# Altium PCB TFT_Adapter_Board_拼版.PcbDoc (part 7 of 9)
Units mm, origin at the board's own origin, x right, y up, seen from the top; angles counter-clockwise.
Board outline 137 x 166.56 mm, 2 copper layers (Top Layer, Bottom Layer); 80 components, 32 nets, 2615 pads, 0 vias.
Unrouted connection lines stored in the file: 1248.
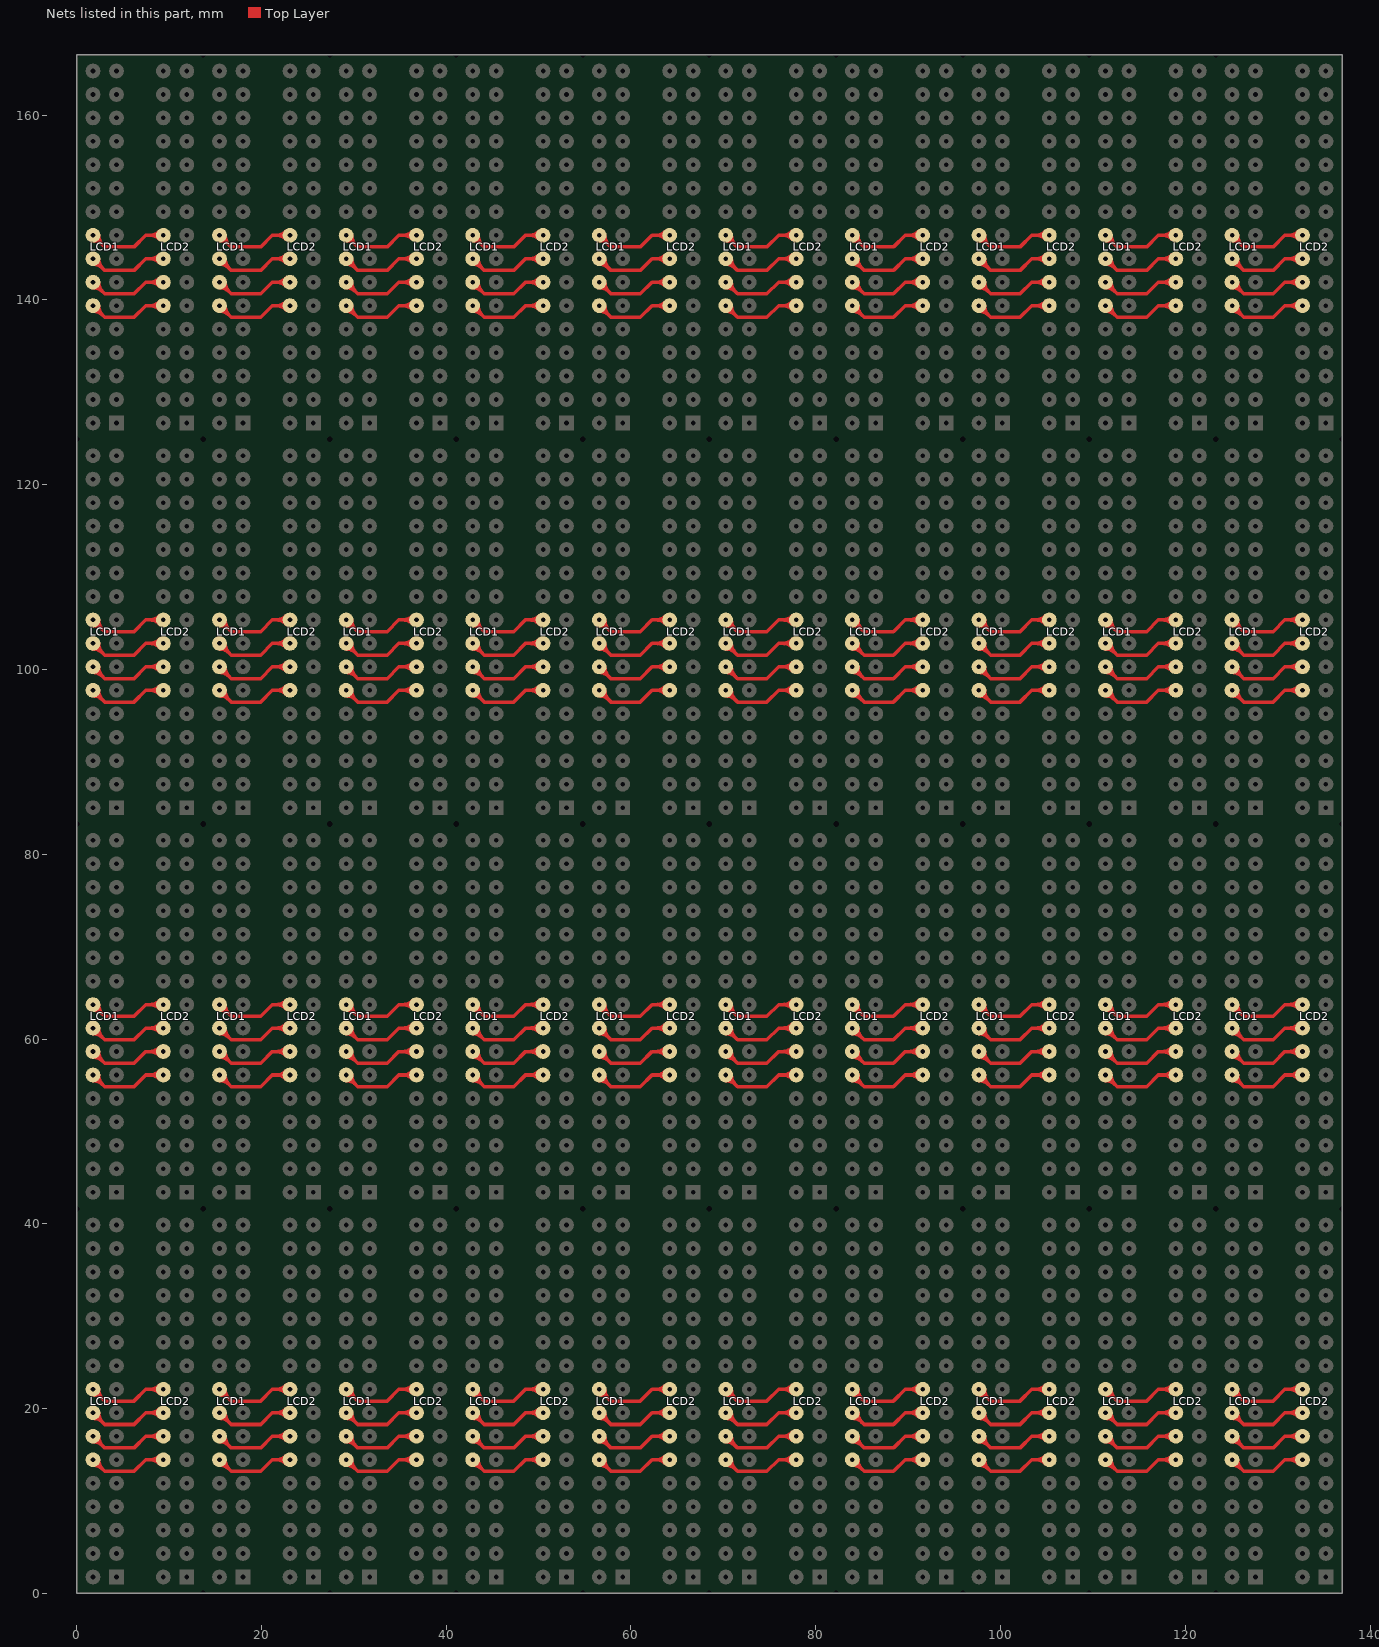
[diagram p7: the nets of this part, all layers, seen from the top]

## Nets (pads, with @x,y where several pads share a name; then routed paths per layer and width w, separated by ;. In a path a pad name is that pad's centre, name@x,y a point inside that pad or via, vN(x,y) a via of type N, cw(c..) or ccw(c..) an arc to the next point about the centre after c; other vN are vias at no path point) (continued)
NetLCD1_24: LCD1.24 LCD2.24 | length 531.8
  Top Layer w0.381: LCD1.24@1.77,21.481 cw(c1.77,20.009) 2.81,21.05 cw(c3.851,22.09) LCD1.24@2.379,22.09 ; LCD1.24@1.77,22.09 3.04,20.82 6.215,20.82 7.485,22.09 LCD2.24@9.39,22.09 ; LCD1.24@1.77,63.12 cw(c1.77,61.649) 2.81,62.69 cw(c3.851,63.73) LCD1.24@2.379,63.73 ; LCD1.24@1.77,63.73 3.04,62.46 6.215,62.46 7.485,63.73 LCD2.24@9.39,63.73 ; LCD1.24@1.77,104.76 cw(c1.77,103.289) 2.81,104.33 cw(c3.851,105.37) LCD1.24@2.379,105.37 ; LCD1.24@1.77,105.37 3.04,104.1 6.215,104.1 7.485,105.37 LCD2.24@9.39,105.37 ; LCD1.24@1.77,146.4 cw(c1.77,144.929) 2.81,145.97 cw(c3.851,147.01) LCD1.24@2.379,147.01 ; LCD1.24@1.77,147.01 3.04,145.74 6.215,145.74 7.485,147.01 LCD2.24@9.39,147.01 ; LCD2.24@8.959,21.659 ccw(c7.919,20.619) 7.919,22.09 ccw(c7.919,23.561) LCD2.24@8.959,22.521 ; LCD2.24@8.959,63.299 ccw(c7.919,62.259) 7.919,63.73 ccw(c7.919,65.201) LCD2.24@8.959,64.161 ; LCD2.24@8.959,104.939 ccw(c7.919,103.899) 7.919,105.37 ccw(c7.919,106.841) LCD2.24@8.959,105.801 ; LCD2.24@8.959,146.579 ccw(c7.919,145.539) 7.919,147.01 ccw(c7.919,148.481) LCD2.24@8.959,147.441 ; LCD1.24@15.47,21.481 cw(c15.47,20.009) 16.51,21.05 cw(c17.551,22.09) LCD1.24@16.079,22.09 ; LCD1.24@15.47,22.09 16.74,20.82 19.915,20.82 21.185,22.09 LCD2.24@23.09,22.09 ; LCD1.24@15.47,63.12 cw(c15.47,61.649) 16.51,62.69 cw(c17.551,63.73) LCD1.24@16.079,63.73 ; LCD1.24@15.47,63.73 16.74,62.46 19.915,62.46 21.185,63.73 LCD2.24@23.09,63.73 ; LCD1.24@15.47,104.76 cw(c15.47,103.289) 16.51,104.33 cw(c17.551,105.37) LCD1.24@16.079,105.37 ; LCD1.24@15.47,105.37 16.74,104.1 19.915,104.1 21.185,105.37 LCD2.24@23.09,105.37 ; LCD1.24@15.47,146.4 cw(c15.47,144.929) 16.51,145.97 cw(c17.551,147.01) LCD1.24@16.079,147.01 ; LCD1.24@15.47,147.01 16.74,145.74 19.915,145.74 21.185,147.01 LCD2.24@23.09,147.01 ; LCD2.24@22.659,21.659 ccw(c21.619,20.619) 21.619,22.09 ccw(c21.619,23.561) LCD2.24@22.659,22.521 ; LCD2.24@22.659,63.299 ccw(c21.619,62.259) 21.619,63.73 ccw(c21.619,65.201) LCD2.24@22.659,64.161 ; LCD2.24@22.659,104.939 ccw(c21.619,103.899) 21.619,105.37 ccw(c21.619,106.841) LCD2.24@22.659,105.801 ; LCD2.24@22.659,146.579 ccw(c21.619,145.539) 21.619,147.01 ccw(c21.619,148.481) LCD2.24@22.659,147.441 ; LCD1.24@29.17,21.481 cw(c29.17,20.009) 30.21,21.05 cw(c31.251,22.09) LCD1.24@29.779,22.09 ; LCD1.24@29.17,22.09 30.44,20.82 33.615,20.82 34.885,22.09 LCD2.24@36.79,22.09 ; LCD1.24@29.17,63.12 cw(c29.17,61.649) 30.21,62.69 cw(c31.251,63.73) LCD1.24@29.779,63.73 ; LCD1.24@29.17,63.73 30.44,62.46 33.615,62.46 34.885,63.73 LCD2.24@36.79,63.73 ; LCD1.24@29.17,104.76 cw(c29.17,103.289) 30.21,104.33 cw(c31.251,105.37) LCD1.24@29.779,105.37 ; LCD1.24@29.17,105.37 30.44,104.1 33.615,104.1 34.885,105.37 LCD2.24@36.79,105.37 ; LCD1.24@29.17,146.4 cw(c29.17,144.929) 30.21,145.97 cw(c31.251,147.01) LCD1.24@29.779,147.01 ; LCD1.24@29.17,147.01 30.44,145.74 33.615,145.74 34.885,147.01 LCD2.24@36.79,147.01 ; LCD2.24@36.359,21.659 ccw(c35.319,20.619) 35.319,22.09 ccw(c35.319,23.561) LCD2.24@36.359,22.521 ; LCD2.24@36.359,63.299 ccw(c35.319,62.259) 35.319,63.73 ccw(c35.319,65.201) LCD2.24@36.359,64.161 ; LCD2.24@36.359,104.939 ccw(c35.319,103.899) 35.319,105.37 ccw(c35.319,106.841) LCD2.24@36.359,105.801 ; LCD2.24@36.359,146.579 ccw(c35.319,145.539) 35.319,147.01 ccw(c35.319,148.481) LCD2.24@36.359,147.441 ; LCD1.24@42.87,21.481 cw(c42.87,20.009) 43.91,21.05 cw(c44.951,22.09) LCD1.24@43.479,22.09 ; LCD1.24@42.87,22.09 44.14,20.82 47.315,20.82 48.585,22.09 LCD2.24@50.49,22.09 ; LCD1.24@42.87,63.12 cw(c42.87,61.649) 43.91,62.69 cw(c44.951,63.73) LCD1.24@43.479,63.73 ; LCD1.24@42.87,63.73 44.14,62.46 47.315,62.46 48.585,63.73 LCD2.24@50.49,63.73 ; LCD1.24@42.87,104.76 cw(c42.87,103.289) 43.91,104.33 cw(c44.951,105.37) LCD1.24@43.479,105.37 ; LCD1.24@42.87,105.37 44.14,104.1 47.315,104.1 48.585,105.37 LCD2.24@50.49,105.37 ; LCD1.24@42.87,146.4 cw(c42.87,144.929) 43.91,145.97 cw(c44.951,147.01) LCD1.24@43.479,147.01 ; LCD1.24@42.87,147.01 44.14,145.74 47.315,145.74 48.585,147.01 LCD2.24@50.49,147.01 ; LCD2.24@50.059,21.659 ccw(c49.019,20.619) 49.019,22.09 ccw(c49.019,23.561) LCD2.24@50.059,22.521 ; LCD2.24@50.059,63.299 ccw(c49.019,62.259) 49.019,63.73 ccw(c49.019,65.201) LCD2.24@50.059,64.161 ; LCD2.24@50.059,104.939 ccw(c49.019,103.899) 49.019,105.37 ccw(c49.019,106.841) LCD2.24@50.059,105.801 ; LCD2.24@50.059,146.579 ccw(c49.019,145.539) 49.019,147.01 ccw(c49.019,148.481) LCD2.24@50.059,147.441 ; LCD1.24@56.57,21.481 cw(c56.57,20.009) 57.61,21.05 cw(c58.651,22.09) LCD1.24@57.179,22.09 ; LCD1.24@56.57,22.09 57.84,20.82 61.015,20.82 62.285,22.09 LCD2.24@64.19,22.09 ; LCD1.24@56.57,63.12 cw(c56.57,61.649) 57.61,62.69 cw(c58.651,63.73) LCD1.24@57.179,63.73 ; LCD1.24@56.57,63.73 57.84,62.46 61.015,62.46 62.285,63.73 LCD2.24@64.19,63.73 ; LCD1.24@56.57,104.76 cw(c56.57,103.289) 57.61,104.33 cw(c58.651,105.37) LCD1.24@57.179,105.37 ; LCD1.24@56.57,105.37 57.84,104.1 61.015,104.1 62.285,105.37 LCD2.24@64.19,105.37 ; LCD1.24@56.57,146.4 cw(c56.57,144.929) 57.61,145.97 cw(c58.651,147.01) LCD1.24@57.179,147.01 ; LCD1.24@56.57,147.01 57.84,145.74 61.015,145.74 62.285,147.01 LCD2.24@64.19,147.01 ; LCD2.24@63.759,21.659 ccw(c62.719,20.619) 62.719,22.09 ccw(c62.719,23.561) LCD2.24@63.759,22.521 ; LCD2.24@63.759,63.299 ccw(c62.719,62.259) 62.719,63.73 ccw(c62.719,65.201) LCD2.24@63.759,64.161 ; LCD2.24@63.759,104.939 ccw(c62.719,103.899) 62.719,105.37 ccw(c62.719,106.841) LCD2.24@63.759,105.801 ; LCD2.24@63.759,146.579 ccw(c62.719,145.539) 62.719,147.01 ccw(c62.719,148.481) LCD2.24@63.759,147.441 ; LCD1.24@70.27,21.481 cw(c70.27,20.009) 71.31,21.05 cw(c72.351,22.09) LCD1.24@70.879,22.09 ; LCD1.24@70.27,22.09 71.54,20.82 74.715,20.82 75.985,22.09 LCD2.24@77.89,22.09 ; LCD1.24@70.27,63.12 cw(c70.27,61.649) 71.31,62.69 cw(c72.351,63.73) LCD1.24@70.879,63.73 ; LCD1.24@70.27,63.73 71.54,62.46 74.715,62.46 75.985,63.73 LCD2.24@77.89,63.73 ; LCD1.24@70.27,104.76 cw(c70.27,103.289) 71.31,104.33 cw(c72.351,105.37) LCD1.24@70.879,105.37 ; LCD1.24@70.27,105.37 71.54,104.1 74.715,104.1 75.985,105.37 LCD2.24@77.89,105.37 ; LCD1.24@70.27,146.4 cw(c70.27,144.929) 71.31,145.97 cw(c72.351,147.01) LCD1.24@70.879,147.01 ; LCD1.24@70.27,147.01 71.54,145.74 74.715,145.74 75.985,147.01 LCD2.24@77.89,147.01 ; LCD2.24@77.459,21.659 ccw(c76.419,20.619) 76.419,22.09 ccw(c76.419,23.561) LCD2.24@77.459,22.521 ; LCD2.24@77.459,63.299 ccw(c76.419,62.259) 76.419,63.73 ccw(c76.419,65.201) LCD2.24@77.459,64.161 ; LCD2.24@77.459,104.939 ccw(c76.419,103.899) 76.419,105.37 ccw(c76.419,106.841) LCD2.24@77.459,105.801 ; LCD2.24@77.459,146.579 ccw(c76.419,145.539) 76.419,147.01 ccw(c76.419,148.481) LCD2.24@77.459,147.441 ; LCD1.24@83.97,21.481 cw(c83.97,20.009) 85.01,21.05 cw(c86.051,22.09) LCD1.24@84.579,22.09 ; LCD1.24@83.97,22.09 85.24,20.82 88.415,20.82 89.685,22.09 LCD2.24@91.59,22.09 ; LCD1.24@83.97,63.12 cw(c83.97,61.649) 85.01,62.69 cw(c86.051,63.73) LCD1.24@84.579,63.73 ; LCD1.24@83.97,63.73 85.24,62.46 88.415,62.46 89.685,63.73 LCD2.24@91.59,63.73 ; LCD1.24@83.97,104.76 cw(c83.97,103.289) 85.01,104.33 cw(c86.051,105.37) LCD1.24@84.579,105.37 ; LCD1.24@83.97,105.37 85.24,104.1 88.415,104.1 89.685,105.37 LCD2.24@91.59,105.37 ; LCD1.24@83.97,146.4 cw(c83.97,144.929) 85.01,145.97 cw(c86.051,147.01) LCD1.24@84.579,147.01 ; LCD1.24@83.97,147.01 85.24,145.74 88.415,145.74 89.685,147.01 LCD2.24@91.59,147.01 ; LCD2.24@91.159,21.659 ccw(c90.119,20.619) 90.119,22.09 ccw(c90.119,23.561) LCD2.24@91.159,22.521 ; LCD2.24@91.159,63.299 ccw(c90.119,62.259) 90.119,63.73 ccw(c90.119,65.201) LCD2.24@91.159,64.161 ; LCD2.24@91.159,104.939 ccw(c90.119,103.899) 90.119,105.37 ccw(c90.119,106.841) LCD2.24@91.159,105.801 ; LCD2.24@91.159,146.579 ccw(c90.119,145.539) 90.119,147.01 ccw(c90.119,148.481) LCD2.24@91.159,147.441 ; LCD1.24@97.67,21.481 cw(c97.67,20.009) 98.71,21.05 cw(c99.751,22.09) LCD1.24@98.279,22.09 ; LCD1.24@97.67,22.09 98.94,20.82 102.115,20.82 103.385,22.09 LCD2.24@105.29,22.09 ; LCD1.24@97.67,63.12 cw(c97.67,61.649) 98.71,62.69 cw(c99.751,63.73) LCD1.24@98.279,63.73 ; LCD1.24@97.67,63.73 98.94,62.46 102.115,62.46 103.385,63.73 LCD2.24@105.29,63.73 ; LCD1.24@97.67,104.76 cw(c97.67,103.289) 98.71,104.33 cw(c99.751,105.37) LCD1.24@98.279,105.37 ; LCD1.24@97.67,105.37 98.94,104.1 102.115,104.1 103.385,105.37 LCD2.24@105.29,105.37 ; LCD1.24@97.67,146.4 cw(c97.67,144.929) 98.71,145.97 cw(c99.751,147.01) LCD1.24@98.279,147.01 ; LCD1.24@97.67,147.01 98.94,145.74 102.115,145.74 103.385,147.01 LCD2.24@105.29,147.01 ; LCD2.24@104.859,21.659 ccw(c103.819,20.619) 103.819,22.09 ccw(c103.819,23.561) LCD2.24@104.859,22.521 ; LCD2.24@104.859,63.299 ccw(c103.819,62.259) 103.819,63.73 ccw(c103.819,65.201) LCD2.24@104.859,64.161 ; LCD2.24@104.859,104.939 ccw(c103.819,103.899) 103.819,105.37 ccw(c103.819,106.841) LCD2.24@104.859,105.801 ; LCD2.24@104.859,146.579 ccw(c103.819,145.539) 103.819,147.01 ccw(c103.819,148.481) LCD2.24@104.859,147.441 ; LCD1.24@111.37,21.481 cw(c111.37,20.009) 112.41,21.05 cw(c113.451,22.09) LCD1.24@111.979,22.09 ; LCD1.24@111.37,22.09 112.64,20.82 115.815,20.82 117.085,22.09 LCD2.24@118.99,22.09 ; LCD1.24@111.37,63.12 cw(c111.37,61.649) 112.41,62.69 cw(c113.451,63.73) LCD1.24@111.979,63.73 ; LCD1.24@111.37,63.73 112.64,62.46 115.815,62.46 117.085,63.73 LCD2.24@118.99,63.73 ; LCD1.24@111.37,104.76 cw(c111.37,103.289) 112.41,104.33 cw(c113.451,105.37) LCD1.24@111.979,105.37 ; LCD1.24@111.37,105.37 112.64,104.1 115.815,104.1 117.085,105.37 LCD2.24@118.99,105.37 ; LCD1.24@111.37,146.4 cw(c111.37,144.929) 112.41,145.97 cw(c113.451,147.01) LCD1.24@111.979,147.01 ; LCD1.24@111.37,147.01 112.64,145.74 115.815,145.74 117.085,147.01 LCD2.24@118.99,147.01 ; LCD2.24@118.559,21.659 ccw(c117.519,20.619) 117.519,22.09 ccw(c117.519,23.561) LCD2.24@118.559,22.521 ; LCD2.24@118.559,63.299 ccw(c117.519,62.259) 117.519,63.73 ccw(c117.519,65.201) LCD2.24@118.559,64.161 ; LCD2.24@118.559,104.939 ccw(c117.519,103.899) 117.519,105.37 ccw(c117.519,106.841) LCD2.24@118.559,105.801 ; LCD2.24@118.559,146.579 ccw(c117.519,145.539) 117.519,147.01 ccw(c117.519,148.481) LCD2.24@118.559,147.441 ; LCD1.24@125.07,21.481 cw(c125.07,20.009) 126.11,21.05 cw(c127.151,22.09) LCD1.24@125.679,22.09 ; LCD1.24@125.07,22.09 126.34,20.82 129.515,20.82 130.785,22.09 LCD2.24@132.69,22.09 ; LCD1.24@125.07,63.12 cw(c125.07,61.649) 126.11,62.69 cw(c127.151,63.73) LCD1.24@125.679,63.73 ; LCD1.24@125.07,63.73 126.34,62.46 129.515,62.46 130.785,63.73 LCD2.24@132.69,63.73 ; LCD1.24@125.07,104.76 cw(c125.07,103.289) 126.11,104.33 cw(c127.151,105.37) LCD1.24@125.679,105.37 ; LCD1.24@125.07,105.37 126.34,104.1 129.515,104.1 130.785,105.37 LCD2.24@132.69,105.37 ; LCD1.24@125.07,146.4 cw(c125.07,144.929) 126.11,145.97 cw(c127.151,147.01) LCD1.24@125.679,147.01 ; LCD1.24@125.07,147.01 126.34,145.74 129.515,145.74 130.785,147.01 LCD2.24@132.69,147.01 ; LCD2.24@132.259,21.659 ccw(c131.219,20.619) 131.219,22.09 ccw(c131.219,23.561) LCD2.24@132.259,22.521 ; LCD2.24@132.259,63.299 ccw(c131.219,62.259) 131.219,63.73 ccw(c131.219,65.201) LCD2.24@132.259,64.161 ; LCD2.24@132.259,104.939 ccw(c131.219,103.899) 131.219,105.37 ccw(c131.219,106.841) LCD2.24@132.259,105.801 ; LCD2.24@132.259,146.579 ccw(c131.219,145.539) 131.219,147.01 ccw(c131.219,148.481) LCD2.24@132.259,147.441
NetLCD1_25: LCD1.25 LCD2.25 | length 531.8
  Top Layer w0.381: LCD1.25@1.77,18.941 cw(c1.77,17.469) 2.81,18.51 cw(c3.851,19.55) LCD1.25@2.379,19.55 ; LCD1.25@1.77,19.55 3.04,18.28 6.215,18.28 7.485,19.55 LCD2.25@9.39,19.55 ; LCD1.25@1.77,60.58 cw(c1.77,59.109) 2.81,60.15 cw(c3.851,61.19) LCD1.25@2.379,61.19 ; LCD1.25@1.77,61.19 3.04,59.92 6.215,59.92 7.485,61.19 LCD2.25@9.39,61.19 ; LCD1.25@1.77,102.22 cw(c1.77,100.749) 2.81,101.79 cw(c3.851,102.83) LCD1.25@2.379,102.83 ; LCD1.25@1.77,102.83 3.04,101.56 6.215,101.56 7.485,102.83 LCD2.25@9.39,102.83 ; LCD1.25@1.77,143.86 cw(c1.77,142.389) 2.81,143.43 cw(c3.851,144.47) LCD1.25@2.379,144.47 ; LCD1.25@1.77,144.47 3.04,143.2 6.215,143.2 7.485,144.47 LCD2.25@9.39,144.47 ; LCD2.25@8.959,19.119 ccw(c7.919,18.079) 7.919,19.55 ccw(c7.919,21.021) LCD2.25@8.959,19.981 ; LCD2.25@8.959,60.759 ccw(c7.919,59.719) 7.919,61.19 ccw(c7.919,62.661) LCD2.25@8.959,61.621 ; LCD2.25@8.959,102.399 ccw(c7.919,101.359) 7.919,102.83 ccw(c7.919,104.301) LCD2.25@8.959,103.261 ; LCD2.25@8.959,144.039 ccw(c7.919,142.999) 7.919,144.47 ccw(c7.919,145.941) LCD2.25@8.959,144.901 ; LCD1.25@15.47,18.941 cw(c15.47,17.469) 16.51,18.51 cw(c17.551,19.55) LCD1.25@16.079,19.55 ; LCD1.25@15.47,19.55 16.74,18.28 19.915,18.28 21.185,19.55 LCD2.25@23.09,19.55 ; LCD1.25@15.47,60.58 cw(c15.47,59.109) 16.51,60.15 cw(c17.551,61.19) LCD1.25@16.079,61.19 ; LCD1.25@15.47,61.19 16.74,59.92 19.915,59.92 21.185,61.19 LCD2.25@23.09,61.19 ; LCD1.25@15.47,102.22 cw(c15.47,100.749) 16.51,101.79 cw(c17.551,102.83) LCD1.25@16.079,102.83 ; LCD1.25@15.47,102.83 16.74,101.56 19.915,101.56 21.185,102.83 LCD2.25@23.09,102.83 ; LCD1.25@15.47,143.86 cw(c15.47,142.389) 16.51,143.43 cw(c17.551,144.47) LCD1.25@16.079,144.47 ; LCD1.25@15.47,144.47 16.74,143.2 19.915,143.2 21.185,144.47 LCD2.25@23.09,144.47 ; LCD2.25@22.659,19.119 ccw(c21.619,18.079) 21.619,19.55 ccw(c21.619,21.021) LCD2.25@22.659,19.981 ; LCD2.25@22.659,60.759 ccw(c21.619,59.719) 21.619,61.19 ccw(c21.619,62.661) LCD2.25@22.659,61.621 ; LCD2.25@22.659,102.399 ccw(c21.619,101.359) 21.619,102.83 ccw(c21.619,104.301) LCD2.25@22.659,103.261 ; LCD2.25@22.659,144.039 ccw(c21.619,142.999) 21.619,144.47 ccw(c21.619,145.941) LCD2.25@22.659,144.901 ; LCD1.25@29.17,18.941 cw(c29.17,17.469) 30.21,18.51 cw(c31.251,19.55) LCD1.25@29.779,19.55 ; LCD1.25@29.17,19.55 30.44,18.28 33.615,18.28 34.885,19.55 LCD2.25@36.79,19.55 ; LCD1.25@29.17,60.58 cw(c29.17,59.109) 30.21,60.15 cw(c31.251,61.19) LCD1.25@29.779,61.19 ; LCD1.25@29.17,61.19 30.44,59.92 33.615,59.92 34.885,61.19 LCD2.25@36.79,61.19 ; LCD1.25@29.17,102.22 cw(c29.17,100.749) 30.21,101.79 cw(c31.251,102.83) LCD1.25@29.779,102.83 ; LCD1.25@29.17,102.83 30.44,101.56 33.615,101.56 34.885,102.83 LCD2.25@36.79,102.83 ; LCD1.25@29.17,143.86 cw(c29.17,142.389) 30.21,143.43 cw(c31.251,144.47) LCD1.25@29.779,144.47 ; LCD1.25@29.17,144.47 30.44,143.2 33.615,143.2 34.885,144.47 LCD2.25@36.79,144.47 ; LCD2.25@36.359,19.119 ccw(c35.319,18.079) 35.319,19.55 ccw(c35.319,21.021) LCD2.25@36.359,19.981 ; LCD2.25@36.359,60.759 ccw(c35.319,59.719) 35.319,61.19 ccw(c35.319,62.661) LCD2.25@36.359,61.621 ; LCD2.25@36.359,102.399 ccw(c35.319,101.359) 35.319,102.83 ccw(c35.319,104.301) LCD2.25@36.359,103.261 ; LCD2.25@36.359,144.039 ccw(c35.319,142.999) 35.319,144.47 ccw(c35.319,145.941) LCD2.25@36.359,144.901 ; LCD1.25@42.87,18.941 cw(c42.87,17.469) 43.91,18.51 cw(c44.951,19.55) LCD1.25@43.479,19.55 ; LCD1.25@42.87,19.55 44.14,18.28 47.315,18.28 48.585,19.55 LCD2.25@50.49,19.55 ; LCD1.25@42.87,60.58 cw(c42.87,59.109) 43.91,60.15 cw(c44.951,61.19) LCD1.25@43.479,61.19 ; LCD1.25@42.87,61.19 44.14,59.92 47.315,59.92 48.585,61.19 LCD2.25@50.49,61.19 ; LCD1.25@42.87,102.22 cw(c42.87,100.749) 43.91,101.79 cw(c44.951,102.83) LCD1.25@43.479,102.83 ; LCD1.25@42.87,102.83 44.14,101.56 47.315,101.56 48.585,102.83 LCD2.25@50.49,102.83 ; LCD1.25@42.87,143.86 cw(c42.87,142.389) 43.91,143.43 cw(c44.951,144.47) LCD1.25@43.479,144.47 ; LCD1.25@42.87,144.47 44.14,143.2 47.315,143.2 48.585,144.47 LCD2.25@50.49,144.47 ; LCD2.25@50.059,19.119 ccw(c49.019,18.079) 49.019,19.55 ccw(c49.019,21.021) LCD2.25@50.059,19.981 ; LCD2.25@50.059,60.759 ccw(c49.019,59.719) 49.019,61.19 ccw(c49.019,62.661) LCD2.25@50.059,61.621 ; LCD2.25@50.059,102.399 ccw(c49.019,101.359) 49.019,102.83 ccw(c49.019,104.301) LCD2.25@50.059,103.261 ; LCD2.25@50.059,144.039 ccw(c49.019,142.999) 49.019,144.47 ccw(c49.019,145.941) LCD2.25@50.059,144.901 ; LCD1.25@56.57,18.941 cw(c56.57,17.469) 57.61,18.51 cw(c58.651,19.55) LCD1.25@57.179,19.55 ; LCD1.25@56.57,19.55 57.84,18.28 61.015,18.28 62.285,19.55 LCD2.25@64.19,19.55 ; LCD1.25@56.57,60.58 cw(c56.57,59.109) 57.61,60.15 cw(c58.651,61.19) LCD1.25@57.179,61.19 ; LCD1.25@56.57,61.19 57.84,59.92 61.015,59.92 62.285,61.19 LCD2.25@64.19,61.19 ; LCD1.25@56.57,102.22 cw(c56.57,100.749) 57.61,101.79 cw(c58.651,102.83) LCD1.25@57.179,102.83 ; LCD1.25@56.57,102.83 57.84,101.56 61.015,101.56 62.285,102.83 LCD2.25@64.19,102.83 ; LCD1.25@56.57,143.86 cw(c56.57,142.389) 57.61,143.43 cw(c58.651,144.47) LCD1.25@57.179,144.47 ; LCD1.25@56.57,144.47 57.84,143.2 61.015,143.2 62.285,144.47 LCD2.25@64.19,144.47 ; LCD2.25@63.759,19.119 ccw(c62.719,18.079) 62.719,19.55 ccw(c62.719,21.021) LCD2.25@63.759,19.981 ; LCD2.25@63.759,60.759 ccw(c62.719,59.719) 62.719,61.19 ccw(c62.719,62.661) LCD2.25@63.759,61.621 ; LCD2.25@63.759,102.399 ccw(c62.719,101.359) 62.719,102.83 ccw(c62.719,104.301) LCD2.25@63.759,103.261 ; LCD2.25@63.759,144.039 ccw(c62.719,142.999) 62.719,144.47 ccw(c62.719,145.941) LCD2.25@63.759,144.901 ; LCD1.25@70.27,18.941 cw(c70.27,17.469) 71.31,18.51 cw(c72.351,19.55) LCD1.25@70.879,19.55 ; LCD1.25@70.27,19.55 71.54,18.28 74.715,18.28 75.985,19.55 LCD2.25@77.89,19.55 ; LCD1.25@70.27,60.58 cw(c70.27,59.109) 71.31,60.15 cw(c72.351,61.19) LCD1.25@70.879,61.19 ; LCD1.25@70.27,61.19 71.54,59.92 74.715,59.92 75.985,61.19 LCD2.25@77.89,61.19 ; LCD1.25@70.27,102.22 cw(c70.27,100.749) 71.31,101.79 cw(c72.351,102.83) LCD1.25@70.879,102.83 ; LCD1.25@70.27,102.83 71.54,101.56 74.715,101.56 75.985,102.83 LCD2.25@77.89,102.83 ; LCD1.25@70.27,143.86 cw(c70.27,142.389) 71.31,143.43 cw(c72.351,144.47) LCD1.25@70.879,144.47 ; LCD1.25@70.27,144.47 71.54,143.2 74.715,143.2 75.985,144.47 LCD2.25@77.89,144.47 ; LCD2.25@77.459,19.119 ccw(c76.419,18.079) 76.419,19.55 ccw(c76.419,21.021) LCD2.25@77.459,19.981 ; LCD2.25@77.459,60.759 ccw(c76.419,59.719) 76.419,61.19 ccw(c76.419,62.661) LCD2.25@77.459,61.621 ; LCD2.25@77.459,102.399 ccw(c76.419,101.359) 76.419,102.83 ccw(c76.419,104.301) LCD2.25@77.459,103.261 ; LCD2.25@77.459,144.039 ccw(c76.419,142.999) 76.419,144.47 ccw(c76.419,145.941) LCD2.25@77.459,144.901 ; LCD1.25@83.97,18.941 cw(c83.97,17.469) 85.01,18.51 cw(c86.051,19.55) LCD1.25@84.579,19.55 ; LCD1.25@83.97,19.55 85.24,18.28 88.415,18.28 89.685,19.55 LCD2.25@91.59,19.55 ; LCD1.25@83.97,60.58 cw(c83.97,59.109) 85.01,60.15 cw(c86.051,61.19) LCD1.25@84.579,61.19 ; LCD1.25@83.97,61.19 85.24,59.92 88.415,59.92 89.685,61.19 LCD2.25@91.59,61.19 ; LCD1.25@83.97,102.22 cw(c83.97,100.749) 85.01,101.79 cw(c86.051,102.83) LCD1.25@84.579,102.83 ; LCD1.25@83.97,102.83 85.24,101.56 88.415,101.56 89.685,102.83 LCD2.25@91.59,102.83 ; LCD1.25@83.97,143.86 cw(c83.97,142.389) 85.01,143.43 cw(c86.051,144.47) LCD1.25@84.579,144.47 ; LCD1.25@83.97,144.47 85.24,143.2 88.415,143.2 89.685,144.47 LCD2.25@91.59,144.47 ; LCD2.25@91.159,19.119 ccw(c90.119,18.079) 90.119,19.55 ccw(c90.119,21.021) LCD2.25@91.159,19.981 ; LCD2.25@91.159,60.759 ccw(c90.119,59.719) 90.119,61.19 ccw(c90.119,62.661) LCD2.25@91.159,61.621 ; LCD2.25@91.159,102.399 ccw(c90.119,101.359) 90.119,102.83 ccw(c90.119,104.301) LCD2.25@91.159,103.261 ; LCD2.25@91.159,144.039 ccw(c90.119,142.999) 90.119,144.47 ccw(c90.119,145.941) LCD2.25@91.159,144.901 ; LCD1.25@97.67,18.941 cw(c97.67,17.469) 98.71,18.51 cw(c99.751,19.55) LCD1.25@98.279,19.55 ; LCD1.25@97.67,19.55 98.94,18.28 102.115,18.28 103.385,19.55 LCD2.25@105.29,19.55 ; LCD1.25@97.67,60.58 cw(c97.67,59.109) 98.71,60.15 cw(c99.751,61.19) LCD1.25@98.279,61.19 ; LCD1.25@97.67,61.19 98.94,59.92 102.115,59.92 103.385,61.19 LCD2.25@105.29,61.19 ; LCD1.25@97.67,102.22 cw(c97.67,100.749) 98.71,101.79 cw(c99.751,102.83) LCD1.25@98.279,102.83 ; LCD1.25@97.67,102.83 98.94,101.56 102.115,101.56 103.385,102.83 LCD2.25@105.29,102.83 ; LCD1.25@97.67,143.86 cw(c97.67,142.389) 98.71,143.43 cw(c99.751,144.47) LCD1.25@98.279,144.47 ; LCD1.25@97.67,144.47 98.94,143.2 102.115,143.2 103.385,144.47 LCD2.25@105.29,144.47 ; LCD2.25@104.859,19.119 ccw(c103.819,18.079) 103.819,19.55 ccw(c103.819,21.021) LCD2.25@104.859,19.981 ; LCD2.25@104.859,60.759 ccw(c103.819,59.719) 103.819,61.19 ccw(c103.819,62.661) LCD2.25@104.859,61.621 ; LCD2.25@104.859,102.399 ccw(c103.819,101.359) 103.819,102.83 ccw(c103.819,104.301) LCD2.25@104.859,103.261 ; LCD2.25@104.859,144.039 ccw(c103.819,142.999) 103.819,144.47 ccw(c103.819,145.941) LCD2.25@104.859,144.901 ; LCD1.25@111.37,18.941 cw(c111.37,17.469) 112.41,18.51 cw(c113.451,19.55) LCD1.25@111.979,19.55 ; LCD1.25@111.37,19.55 112.64,18.28 115.815,18.28 117.085,19.55 LCD2.25@118.99,19.55 ; LCD1.25@111.37,60.58 cw(c111.37,59.109) 112.41,60.15 cw(c113.451,61.19) LCD1.25@111.979,61.19 ; LCD1.25@111.37,61.19 112.64,59.92 115.815,59.92 117.085,61.19 LCD2.25@118.99,61.19 ; LCD1.25@111.37,102.22 cw(c111.37,100.749) 112.41,101.79 cw(c113.451,102.83) LCD1.25@111.979,102.83 ; LCD1.25@111.37,102.83 112.64,101.56 115.815,101.56 117.085,102.83 LCD2.25@118.99,102.83 ; LCD1.25@111.37,143.86 cw(c111.37,142.389) 112.41,143.43 cw(c113.451,144.47) LCD1.25@111.979,144.47 ; LCD1.25@111.37,144.47 112.64,143.2 115.815,143.2 117.085,144.47 LCD2.25@118.99,144.47 ; LCD2.25@118.559,19.119 ccw(c117.519,18.079) 117.519,19.55 ccw(c117.519,21.021) LCD2.25@118.559,19.981 ; LCD2.25@118.559,60.759 ccw(c117.519,59.719) 117.519,61.19 ccw(c117.519,62.661) LCD2.25@118.559,61.621 ; LCD2.25@118.559,102.399 ccw(c117.519,101.359) 117.519,102.83 ccw(c117.519,104.301) LCD2.25@118.559,103.261 ; LCD2.25@118.559,144.039 ccw(c117.519,142.999) 117.519,144.47 ccw(c117.519,145.941) LCD2.25@118.559,144.901 ; LCD1.25@125.07,18.941 cw(c125.07,17.469) 126.11,18.51 cw(c127.151,19.55) LCD1.25@125.679,19.55 ; LCD1.25@125.07,19.55 126.34,18.28 129.515,18.28 130.785,19.55 LCD2.25@132.69,19.55 ; LCD1.25@125.07,60.58 cw(c125.07,59.109) 126.11,60.15 cw(c127.151,61.19) LCD1.25@125.679,61.19 ; LCD1.25@125.07,61.19 126.34,59.92 129.515,59.92 130.785,61.19 LCD2.25@132.69,61.19 ; LCD1.25@125.07,102.22 cw(c125.07,100.749) 126.11,101.79 cw(c127.151,102.83) LCD1.25@125.679,102.83 ; LCD1.25@125.07,102.83 126.34,101.56 129.515,101.56 130.785,102.83 LCD2.25@132.69,102.83 ; LCD1.25@125.07,143.86 cw(c125.07,142.389) 126.11,143.43 cw(c127.151,144.47) LCD1.25@125.679,144.47 ; LCD1.25@125.07,144.47 126.34,143.2 129.515,143.2 130.785,144.47 LCD2.25@132.69,144.47 ; LCD2.25@132.259,19.119 ccw(c131.219,18.079) 131.219,19.55 ccw(c131.219,21.021) LCD2.25@132.259,19.981 ; LCD2.25@132.259,60.759 ccw(c131.219,59.719) 131.219,61.19 ccw(c131.219,62.661) LCD2.25@132.259,61.621 ; LCD2.25@132.259,102.399 ccw(c131.219,101.359) 131.219,102.83 ccw(c131.219,104.301) LCD2.25@132.259,103.261 ; LCD2.25@132.259,144.039 ccw(c131.219,142.999) 131.219,144.47 ccw(c131.219,145.941) LCD2.25@132.259,144.901
NetLCD1_26: LCD1.26 LCD2.26 | length 531.8
  Top Layer w0.381: LCD1.26@1.77,16.401 cw(c1.77,14.929) 2.81,15.97 cw(c3.851,17.01) LCD1.26@2.379,17.01 ; LCD1.26@1.77,17.01 3.04,15.74 6.215,15.74 7.485,17.01 LCD2.26@9.39,17.01 ; LCD1.26@1.77,58.04 cw(c1.77,56.569) 2.81,57.61 cw(c3.851,58.65) LCD1.26@2.379,58.65 ; LCD1.26@1.77,58.65 3.04,57.38 6.215,57.38 7.485,58.65 LCD2.26@9.39,58.65 ; LCD1.26@1.77,99.68 cw(c1.77,98.209) 2.81,99.25 cw(c3.851,100.29) LCD1.26@2.379,100.29 ; LCD1.26@1.77,100.29 3.04,99.02 6.215,99.02 7.485,100.29 LCD2.26@9.39,100.29 ; LCD1.26@1.77,141.32 cw(c1.77,139.849) 2.81,140.89 cw(c3.851,141.93) LCD1.26@2.379,141.93 ; LCD1.26@1.77,141.93 3.04,140.66 6.215,140.66 7.485,141.93 LCD2.26@9.39,141.93 ; LCD2.26@8.959,16.579 ccw(c7.919,15.539) 7.919,17.01 ccw(c7.919,18.481) LCD2.26@8.959,17.441 ; LCD2.26@8.959,58.219 ccw(c7.919,57.179) 7.919,58.65 ccw(c7.919,60.121) LCD2.26@8.959,59.081 ; LCD2.26@8.959,99.859 ccw(c7.919,98.819) 7.919,100.29 ccw(c7.919,101.761) LCD2.26@8.959,100.721 ; LCD2.26@8.959,141.499 ccw(c7.919,140.459) 7.919,141.93 ccw(c7.919,143.401) LCD2.26@8.959,142.361 ; LCD1.26@15.47,16.401 cw(c15.47,14.929) 16.51,15.97 cw(c17.551,17.01) LCD1.26@16.079,17.01 ; LCD1.26@15.47,17.01 16.74,15.74 19.915,15.74 21.185,17.01 LCD2.26@23.09,17.01 ; LCD1.26@15.47,58.04 cw(c15.47,56.569) 16.51,57.61 cw(c17.551,58.65) LCD1.26@16.079,58.65 ; LCD1.26@15.47,58.65 16.74,57.38 19.915,57.38 21.185,58.65 LCD2.26@23.09,58.65 ; LCD1.26@15.47,99.68 cw(c15.47,98.209) 16.51,99.25 cw(c17.551,100.29) LCD1.26@16.079,100.29 ; LCD1.26@15.47,100.29 16.74,99.02 19.915,99.02 21.185,100.29 LCD2.26@23.09,100.29 ; LCD1.26@15.47,141.32 cw(c15.47,139.849) 16.51,140.89 cw(c17.551,141.93) LCD1.26@16.079,141.93 ; LCD1.26@15.47,141.93 16.74,140.66 19.915,140.66 21.185,141.93 LCD2.26@23.09,141.93 ; LCD2.26@22.659,16.579 ccw(c21.619,15.539) 21.619,17.01 ccw(c21.619,18.481) LCD2.26@22.659,17.441 ; LCD2.26@22.659,58.219 ccw(c21.619,57.179) 21.619,58.65 ccw(c21.619,60.121) LCD2.26@22.659,59.081 ; LCD2.26@22.659,99.859 ccw(c21.619,98.819) 21.619,100.29 ccw(c21.619,101.761) LCD2.26@22.659,100.721 ; LCD2.26@22.659,141.499 ccw(c21.619,140.459) 21.619,141.93 ccw(c21.619,143.401) LCD2.26@22.659,142.361 ; LCD1.26@29.17,16.401 cw(c29.17,14.929) 30.21,15.97 cw(c31.251,17.01) LCD1.26@29.779,17.01 ; LCD1.26@29.17,17.01 30.44,15.74 33.615,15.74 34.885,17.01 LCD2.26@36.79,17.01 ; LCD1.26@29.17,58.04 cw(c29.17,56.569) 30.21,57.61 cw(c31.251,58.65) LCD1.26@29.779,58.65 ; LCD1.26@29.17,58.65 30.44,57.38 33.615,57.38 34.885,58.65 LCD2.26@36.79,58.65 ; LCD1.26@29.17,99.68 cw(c29.17,98.209) 30.21,99.25 cw(c31.251,100.29) LCD1.26@29.779,100.29 ; LCD1.26@29.17,100.29 30.44,99.02 33.615,99.02 34.885,100.29 LCD2.26@36.79,100.29 ; LCD1.26@29.17,141.32 cw(c29.17,139.849) 30.21,140.89 cw(c31.251,141.93) LCD1.26@29.779,141.93 ; LCD1.26@29.17,141.93 30.44,140.66 33.615,140.66 34.885,141.93 LCD2.26@36.79,141.93 ; LCD2.26@36.359,16.579 ccw(c35.319,15.539) 35.319,17.01 ccw(c35.319,18.481) LCD2.26@36.359,17.441 ; LCD2.26@36.359,58.219 ccw(c35.319,57.179) 35.319,58.65 ccw(c35.319,60.121) LCD2.26@36.359,59.081 ; LCD2.26@36.359,99.859 ccw(c35.319,98.819) 35.319,100.29 ccw(c35.319,101.761) LCD2.26@36.359,100.721 ; LCD2.26@36.359,141.499 ccw(c35.319,140.459) 35.319,141.93 ccw(c35.319,143.401) LCD2.26@36.359,142.361 ; LCD1.26@42.87,16.401 cw(c42.87,14.929) 43.91,15.97 cw(c44.951,17.01) LCD1.26@43.479,17.01 ; LCD1.26@42.87,17.01 44.14,15.74 47.315,15.74 48.585,17.01 LCD2.26@50.49,17.01 ; LCD1.26@42.87,58.04 cw(c42.87,56.569) 43.91,57.61 cw(c44.951,58.65) LCD1.26@43.479,58.65 ; LCD1.26@42.87,58.65 44.14,57.38 47.315,57.38 48.585,58.65 LCD2.26@50.49,58.65 ; LCD1.26@42.87,99.68 cw(c42.87,98.209) 43.91,99.25 cw(c44.951,100.29) LCD1.26@43.479,100.29 ; LCD1.26@42.87,100.29 44.14,99.02 47.315,99.02 48.585,100.29 LCD2.26@50.49,100.29 ; LCD1.26@42.87,141.32 cw(c42.87,139.849) 43.91,140.89 cw(c44.951,141.93) LCD1.26@43.479,141.93 ; LCD1.26@42.87,141.93 44.14,140.66 47.315,140.66 48.585,141.93 LCD2.26@50.49,141.93 ; LCD2.26@50.059,16.579 ccw(c49.019,15.539) 49.019,17.01 ccw(c49.019,18.481) LCD2.26@50.059,17.441 ; LCD2.26@50.059,58.219 ccw(c49.019,57.179) 49.019,58.65 ccw(c49.019,60.121) LCD2.26@50.059,59.081 ; LCD2.26@50.059,99.859 ccw(c49.019,98.819) 49.019,100.29 ccw(c49.019,101.761) LCD2.26@50.059,100.721 ; LCD2.26@50.059,141.499 ccw(c49.019,140.459) 49.019,141.93 ccw(c49.019,143.401) LCD2.26@50.059,142.361 ; LCD1.26@56.57,16.401 cw(c56.57,14.929) 57.61,15.97 cw(c58.651,17.01) LCD1.26@57.179,17.01 ; LCD1.26@56.57,17.01 57.84,15.74 61.015,15.74 62.285,17.01 LCD2.26@64.19,17.01 ; LCD1.26@56.57,58.04 cw(c56.57,56.569) 57.61,57.61 cw(c58.651,58.65) LCD1.26@57.179,58.65 ; LCD1.26@56.57,58.65 57.84,57.38 61.015,57.38 62.285,58.65 LCD2.26@64.19,58.65 ; LCD1.26@56.57,99.68 cw(c56.57,98.209) 57.61,99.25 cw(c58.651,100.29) LCD1.26@57.179,100.29 ; LCD1.26@56.57,100.29 57.84,99.02 61.015,99.02 62.285,100.29 LCD2.26@64.19,100.29 ; LCD1.26@56.57,141.32 cw(c56.57,139.849) 57.61,140.89 cw(c58.651,141.93) LCD1.26@57.179,141.93 ; LCD1.26@56.57,141.93 57.84,140.66 61.015,140.66 62.285,141.93 LCD2.26@64.19,141.93 ; LCD2.26@63.759,16.579 ccw(c62.719,15.539) 62.719,17.01 ccw(c62.719,18.481) LCD2.26@63.759,17.441 ; LCD2.26@63.759,58.219 ccw(c62.719,57.179) 62.719,58.65 ccw(c62.719,60.121) LCD2.26@63.759,59.081 ; LCD2.26@63.759,99.859 ccw(c62.719,98.819) 62.719,100.29 ccw(c62.719,101.761) LCD2.26@63.759,100.721 ; LCD2.26@63.759,141.499 ccw(c62.719,140.459) 62.719,141.93 ccw(c62.719,143.401) LCD2.26@63.759,142.361 ; LCD1.26@70.27,16.401 cw(c70.27,14.929) 71.31,15.97 cw(c72.351,17.01) LCD1.26@70.879,17.01 ; LCD1.26@70.27,17.01 71.54,15.74 74.715,15.74 75.985,17.01 LCD2.26@77.89,17.01 ; LCD1.26@70.27,58.04 cw(c70.27,56.569) 71.31,57.61 cw(c72.351,58.65) LCD1.26@70.879,58.65 ; LCD1.26@70.27,58.65 71.54,57.38 74.715,57.38 75.985,58.65 LCD2.26@77.89,58.65 ; LCD1.26@70.27,99.68 cw(c70.27,98.209) 71.31,99.25 cw(c72.351,100.29) LCD1.26@70.879,100.29 ; LCD1.26@70.27,100.29 71.54,99.02 74.715,99.02 75.985,100.29 LCD2.26@77.89,100.29 ; LCD1.26@70.27,141.32 cw(c70.27,139.849) 71.31,140.89 cw(c72.351,141.93) LCD1.26@70.879,141.93 ; LCD1.26@70.27,141.93 71.54,140.66 74.715,140.66 75.985,141.93 LCD2.26@77.89,141.93 ; LCD2.26@77.459,16.579 ccw(c76.419,15.539) 76.419,17.01 ccw(c76.419,18.481) LCD2.26@77.459,17.441 ; LCD2.26@77.459,58.219 ccw(c76.419,57.179) 76.419,58.65 ccw(c76.419,60.121) LCD2.26@77.459,59.081 ; LCD2.26@77.459,99.859 ccw(c76.419,98.819) 76.419,100.29 ccw(c76.419,101.761) LCD2.26@77.459,100.721 ; LCD2.26@77.459,141.499 ccw(c76.419,140.459) 76.419,141.93 ccw(c76.419,143.401) LCD2.26@77.459,142.361 ; LCD1.26@83.97,16.401 cw(c83.97,14.929) 85.01,15.97 cw(c86.051,17.01) LCD1.26@84.579,17.01 ; LCD1.26@83.97,17.01 85.24,15.74 88.415,15.74 89.685,17.01 LCD2.26@91.59,17.01 ; LCD1.26@83.97,58.04 cw(c83.97,56.569) 85.01,57.61 cw(c86.051,58.65) LCD1.26@84.579,58.65 ; LCD1.26@83.97,58.65 85.24,57.38 88.415,57.38 89.685,58.65 LCD2.26@91.59,58.65 ; LCD1.26@83.97,99.68 cw(c83.97,98.209) 85.01,99.25 cw(c86.051,100.29) LCD1.26@84.579,100.29 ; LCD1.26@83.97,100.29 85.24,99.02 88.415,99.02 89.685,100.29 LCD2.26@91.59,100.29 ; LCD1.26@83.97,141.32 cw(c83.97,139.849) 85.01,140.89 cw(c86.051,141.93) LCD1.26@84.579,141.93 ; LCD1.26@83.97,141.93 85.24,140.66 88.415,140.66 89.685,141.93 LCD2.26@91.59,141.93 ; LCD2.26@91.159,16.579 ccw(c90.119,15.539) 90.119,17.01 ccw(c90.119,18.481) LCD2.26@91.159,17.441 ; LCD2.26@91.159,58.219 ccw(c90.119,57.179) 90.119,58.65 ccw(c90.119,60.121) LCD2.26@91.159,59.081 ; LCD2.26@91.159,99.859 ccw(c90.119,98.819) 90.119,100.29 ccw(c90.119,101.761) LCD2.26@91.159,100.721 ; LCD2.26@91.159,141.499 ccw(c90.119,140.459) 90.119,141.93 ccw(c90.119,143.401) LCD2.26@91.159,142.361 ; LCD1.26@97.67,16.401 cw(c97.67,14.929) 98.71,15.97 cw(c99.751,17.01) LCD1.26@98.279,17.01 ; LCD1.26@97.67,17.01 98.94,15.74 102.115,15.74 103.385,17.01 LCD2.26@105.29,17.01 ; LCD1.26@97.67,58.04 cw(c97.67,56.569) 98.71,57.61 cw(c99.751,58.65) LCD1.26@98.279,58.65 ; LCD1.26@97.67,58.65 98.94,57.38 102.115,57.38 103.385,58.65 LCD2.26@105.29,58.65 ; LCD1.26@97.67,99.68 cw(c97.67,98.209) 98.71,99.25 cw(c99.751,100.29) LCD1.26@98.279,100.29 ; LCD1.26@97.67,100.29 98.94,99.02 102.115,99.02 103.385,100.29 LCD2.26@105.29,100.29 ; LCD1.26@97.67,141.32 cw(c97.67,139.849) 98.71,140.89 cw(c99.751,141.93) LCD1.26@98.279,141.93 ; LCD1.26@97.67,141.93 98.94,140.66 102.115,140.66 103.385,141.93 LCD2.26@105.29,141.93 ; LCD2.26@104.859,16.579 ccw(c103.819,15.539) 103.819,17.01 ccw(c103.819,18.481) LCD2.26@104.859,17.441 ; LCD2.26@104.859,58.219 ccw(c103.819,57.179) 103.819,58.65 ccw(c103.819,60.121) LCD2.26@104.859,59.081 ; LCD2.26@104.859,99.859 ccw(c103.819,98.819) 103.819,100.29 ccw(c103.819,101.761) LCD2.26@104.859,100.721 ; LCD2.26@104.859,141.499 ccw(c103.819,140.459) 103.819,141.93 ccw(c103.819,143.401) LCD2.26@104.859,142.361 ; LCD1.26@111.37,16.401 cw(c111.37,14.929) 112.41,15.97 cw(c113.451,17.01) LCD1.26@111.979,17.01 ; LCD1.26@111.37,17.01 112.64,15.74 115.815,15.74 117.085,17.01 LCD2.26@118.99,17.01 ; LCD1.26@111.37,58.04 cw(c111.37,56.569) 112.41,57.61 cw(c113.451,58.65) LCD1.26@111.979,58.65 ; LCD1.26@111.37,58.65 112.64,57.38 115.815,57.38 117.085,58.65 LCD2.26@118.99,58.65 ; LCD1.26@111.37,99.68 cw(c111.37,98.209) 112.41,99.25 cw(c113.451,100.29) LCD1.26@111.979,100.29 ; LCD1.26@111.37,100.29 112.64,99.02 115.815,99.02 117.085,100.29 LCD2.26@118.99,100.29 ; LCD1.26@111.37,141.32 cw(c111.37,139.849) 112.41,140.89 cw(c113.451,141.93) LCD1.26@111.979,141.93 ; LCD1.26@111.37,141.93 112.64,140.66 115.815,140.66 117.085,141.93 LCD2.26@118.99,141.93 ; LCD2.26@118.559,16.579 ccw(c117.519,15.539) 117.519,17.01 ccw(c117.519,18.481) LCD2.26@118.559,17.441 ; LCD2.26@118.559,58.219 ccw(c117.519,57.179) 117.519,58.65 ccw(c117.519,60.121) LCD2.26@118.559,59.081 ; LCD2.26@118.559,99.859 ccw(c117.519,98.819) 117.519,100.29 ccw(c117.519,101.761) LCD2.26@118.559,100.721 ; LCD2.26@118.559,141.499 ccw(c117.519,140.459) 117.519,141.93 ccw(c117.519,143.401) LCD2.26@118.559,142.361 ; LCD1.26@125.07,16.401 cw(c125.07,14.929) 126.11,15.97 cw(c127.151,17.01) LCD1.26@125.679,17.01 ; LCD1.26@125.07,17.01 126.34,15.74 129.515,15.74 130.785,17.01 LCD2.26@132.69,17.01 ; LCD1.26@125.07,58.04 cw(c125.07,56.569) 126.11,57.61 cw(c127.151,58.65) LCD1.26@125.679,58.65 ; LCD1.26@125.07,58.65 126.34,57.38 129.515,57.38 130.785,58.65 LCD2.26@132.69,58.65 ; LCD1.26@125.07,99.68 cw(c125.07,98.209) 126.11,99.25 cw(c127.151,100.29) LCD1.26@125.679,100.29 ; LCD1.26@125.07,100.29 126.34,99.02 129.515,99.02 130.785,100.29 LCD2.26@132.69,100.29 ; LCD1.26@125.07,141.32 cw(c125.07,139.849) 126.11,140.89 cw(c127.151,141.93) LCD1.26@125.679,141.93 ; LCD1.26@125.07,141.93 126.34,140.66 129.515,140.66 130.785,141.93 LCD2.26@132.69,141.93 ; LCD2.26@132.259,16.579 ccw(c131.219,15.539) 131.219,17.01 ccw(c131.219,18.481) LCD2.26@132.259,17.441 ; LCD2.26@132.259,58.219 ccw(c131.219,57.179) 131.219,58.65 ccw(c131.219,60.121) LCD2.26@132.259,59.081 ; LCD2.26@132.259,99.859 ccw(c131.219,98.819) 131.219,100.29 ccw(c131.219,101.761) LCD2.26@132.259,100.721 ; LCD2.26@132.259,141.499 ccw(c131.219,140.459) 131.219,141.93 ccw(c131.219,143.401) LCD2.26@132.259,142.361
NetLCD1_27: LCD1.27 LCD2.27 | length 531.8
  Top Layer w0.381: LCD1.27@1.77,13.861 cw(c1.77,12.389) 2.81,13.43 cw(c3.851,14.47) LCD1.27@2.379,14.47 ; LCD1.27@1.77,14.47 3.04,13.2 6.215,13.2 7.485,14.47 LCD2.27@9.39,14.47 ; LCD1.27@1.77,55.5 cw(c1.77,54.029) 2.81,55.07 cw(c3.851,56.11) LCD1.27@2.379,56.11 ; LCD1.27@1.77,56.11 3.04,54.84 6.215,54.84 7.485,56.11 LCD2.27@9.39,56.11 ; LCD1.27@1.77,97.14 cw(c1.77,95.669) 2.81,96.71 cw(c3.851,97.75) LCD1.27@2.379,97.75 ; LCD1.27@1.77,97.75 3.04,96.48 6.215,96.48 7.485,97.75 LCD2.27@9.39,97.75 ; LCD1.27@1.77,138.78 cw(c1.77,137.309) 2.81,138.35 cw(c3.851,139.39) LCD1.27@2.379,139.39 ; LCD1.27@1.77,139.39 3.04,138.12 6.215,138.12 7.485,139.39 LCD2.27@9.39,139.39 ; LCD2.27@8.959,14.039 ccw(c7.919,12.999) 7.919,14.47 ccw(c7.919,15.941) LCD2.27@8.959,14.901 ; LCD2.27@8.959,55.679 ccw(c7.919,54.639) 7.919,56.11 ccw(c7.919,57.581) LCD2.27@8.959,56.541 ; LCD2.27@8.959,97.319 ccw(c7.919,96.279) 7.919,97.75 ccw(c7.919,99.221) LCD2.27@8.959,98.181 ; LCD2.27@8.959,138.959 ccw(c7.919,137.919) 7.919,139.39 ccw(c7.919,140.861) LCD2.27@8.959,139.821 ; LCD1.27@15.47,13.861 cw(c15.47,12.389) 16.51,13.43 cw(c17.551,14.47) LCD1.27@16.079,14.47 ; LCD1.27@15.47,14.47 16.74,13.2 19.915,13.2 21.185,14.47 LCD2.27@23.09,14.47 ; LCD1.27@15.47,55.5 cw(c15.47,54.029) 16.51,55.07 cw(c17.551,56.11) LCD1.27@16.079,56.11 ; LCD1.27@15.47,56.11 16.74,54.84 19.915,54.84 21.185,56.11 LCD2.27@23.09,56.11 ; LCD1.27@15.47,97.14 cw(c15.47,95.669) 16.51,96.71 cw(c17.551,97.75) LCD1.27@16.079,97.75 ; LCD1.27@15.47,97.75 16.74,96.48 19.915,96.48 21.185,97.75 LCD2.27@23.09,97.75 ; LCD1.27@15.47,138.78 cw(c15.47,137.309) 16.51,138.35 cw(c17.551,139.39) LCD1.27@16.079,139.39 ; LCD1.27@15.47,139.39 16.74,138.12 19.915,138.12 21.185,139.39 LCD2.27@23.09,139.39 ; LCD2.27@22.659,14.039 ccw(c21.619,12.999) 21.619,14.47 ccw(c21.619,15.941) LCD2.27@22.659,14.901 ; LCD2.27@22.659,55.679 ccw(c21.619,54.639) 21.619,56.11 ccw(c21.619,57.581) LCD2.27@22.659,56.541 ; LCD2.27@22.659,97.319 ccw(c21.619,96.279) 21.619,97.75 ccw(c21.619,99.221) LCD2.27@22.659,98.181 ; LCD2.27@22.659,138.959 ccw(c21.619,137.919) 21.619,139.39 ccw(c21.619,140.861) LCD2.27@22.659,139.821 ; LCD1.27@29.17,13.861 cw(c29.17,12.389) 30.21,13.43 cw(c31.251,14.47) LCD1.27@29.779,14.47 ; LCD1.27@29.17,14.47 30.44,13.2 33.615,13.2 34.885,14.47 LCD2.27@36.79,14.47 ; LCD1.27@29.17,55.5 cw(c29.17,54.029) 30.21,55.07 cw(c31.251,56.11) LCD1.27@29.779,56.11 ; LCD1.27@29.17,56.11 30.44,54.84 33.615,54.84 34.885,56.11 LCD2.27@36.79,56.11 ; LCD1.27@29.17,97.14 cw(c29.17,95.669) 30.21,96.71 cw(c31.251,97.75) LCD1.27@29.779,97.75 ; LCD1.27@29.17,97.75 30.44,96.48 33.615,96.48 34.885,97.75 LCD2.27@36.79,97.75 ; LCD1.27@29.17,138.78 cw(c29.17,137.309) 30.21,138.35 cw(c31.251,139.39) LCD1.27@29.779,139.39 ; LCD1.27@29.17,139.39 30.44,138.12 33.615,138.12 34.885,139.39 LCD2.27@36.79,139.39 ; LCD2.27@36.359,14.039 ccw(c35.319,12.999) 35.319,14.47 ccw(c35.319,15.941) LCD2.27@36.359,14.901 ; LCD2.27@36.359,55.679 ccw(c35.319,54.639) 35.319,56.11 ccw(c35.319,57.581) LCD2.27@36.359,56.541 ; LCD2.27@36.359,97.319 ccw(c35.319,96.279) 35.319,97.75 ccw(c35.319,99.221) LCD2.27@36.359,98.181 ; LCD2.27@36.359,138.959 ccw(c35.319,137.919) 35.319,139.39 ccw(c35.319,140.861) LCD2.27@36.359,139.821 ; LCD1.27@42.87,13.861 cw(c42.87,12.389) 43.91,13.43 cw(c44.951,14.47) LCD1.27@43.479,14.47 ; LCD1.27@42.87,14.47 44.14,13.2 47.315,13.2 48.585,14.47 LCD2.27@50.49,14.47 ; LCD1.27@42.87,55.5 cw(c42.87,54.029) 43.91,55.07 cw(c44.951,56.11) LCD1.27@43.479,56.11 ; LCD1.27@42.87,56.11 44.14,54.84 47.315,54.84 48.585,56.11 LCD2.27@50.49,56.11 ; LCD1.27@42.87,97.14 cw(c42.87,95.669) 43.91,96.71 cw(c44.951,97.75) LCD1.27@43.479,97.75 ; LCD1.27@42.87,97.75 44.14,96.48 47.315,96.48 48.585,97.75 LCD2.27@50.49,97.75 ; LCD1.27@42.87,138.78 cw(c42.87,137.309) 43.91,138.35 cw(c44.951,139.39) LCD1.27@43.479,139.39 ; LCD1.27@42.87,139.39 44.14,138.12 47.315,138.12 48.585,139.39 LCD2.27@50.49,139.39 ; LCD2.27@50.059,14.039 ccw(c49.019,12.999) 49.019,14.47 ccw(c49.019,15.941) LCD2.27@50.059,14.901 ; LCD2.27@50.059,55.679 ccw(c49.019,54.639) 49.019,56.11 ccw(c49.019,57.581) LCD2.27@50.059,56.541 ; LCD2.27@50.059,97.319 ccw(c49.019,96.279) 49.019,97.75 ccw(c49.019,99.221) LCD2.27@50.059,98.181 ; LCD2.27@50.059,138.959 ccw(c49.019,137.919) 49.019,139.39 ccw(c49.019,140.861) LCD2.27@50.059,139.821 ; LCD1.27@56.57,13.861 cw(c56.57,12.389) 57.61,13.43 cw(c58.651,14.47) LCD1.27@57.179,14.47 ; LCD1.27@56.57,14.47 57.84,13.2 61.015,13.2 62.285,14.47 LCD2.27@64.19,14.47 ; LCD1.27@56.57,55.5 cw(c56.57,54.029) 57.61,55.07 cw(c58.651,56.11) LCD1.27@57.179,56.11 ; LCD1.27@56.57,56.11 57.84,54.84 61.015,54.84 62.285,56.11 LCD2.27@64.19,56.11 ; LCD1.27@56.57,97.14 cw(c56.57,95.669) 57.61,96.71 cw(c58.651,97.75) LCD1.27@57.179,97.75 ; LCD1.27@56.57,97.75 57.84,96.48 61.015,96.48 62.285,97.75 LCD2.27@64.19,97.75 ; LCD1.27@56.57,138.78 cw(c56.57,137.309) 57.61,138.35 cw(c58.651,139.39) LCD1.27@57.179,139.39 ; LCD1.27@56.57,139.39 57.84,138.12 61.015,138.12 62.285,139.39 LCD2.27@64.19,139.39 ; LCD2.27@63.759,14.039 ccw(c62.719,12.999) 62.719,14.47 ccw(c62.719,15.941) LCD2.27@63.759,14.901 ; LCD2.27@63.759,55.679 ccw(c62.719,54.639) 62.719,56.11 ccw(c62.719,57.581) LCD2.27@63.759,56.541 ; LCD2.27@63.759,97.319 ccw(c62.719,96.279) 62.719,97.75 ccw(c62.719,99.221) LCD2.27@63.759,98.181 ; LCD2.27@63.759,138.959 ccw(c62.719,137.919) 62.719,139.39 ccw(c62.719,140.861) LCD2.27@63.759,139.821 ; LCD1.27@70.27,13.861 cw(c70.27,12.389) 71.31,13.43 cw(c72.351,14.47) LCD1.27@70.879,14.47 ; LCD1.27@70.27,14.47 71.54,13.2 74.715,13.2 75.985,14.47 LCD2.27@77.89,14.47 ; LCD1.27@70.27,55.5 cw(c70.27,54.029) 71.31,55.07 cw(c72.351,56.11) LCD1.27@70.879,56.11 ; LCD1.27@70.27,56.11 71.54,54.84 74.715,54.84 75.985,56.11 LCD2.27@77.89,56.11 ; LCD1.27@70.27,97.14 cw(c70.27,95.669) 71.31,96.71 cw(c72.351,97.75) LCD1.27@70.879,97.75 ; LCD1.27@70.27,97.75 71.54,96.48 74.715,96.48 75.985,97.75 LCD2.27@77.89,97.75 ; LCD1.27@70.27,138.78 cw(c70.27,137.309) 71.31,138.35 cw(c72.351,139.39) LCD1.27@70.879,139.39 ; LCD1.27@70.27,139.39 71.54,138.12 74.715,138.12 75.985,139.39 LCD2.27@77.89,139.39 ; LCD2.27@77.459,14.039 ccw(c76.419,12.999) 76.419,14.47 ccw(c76.419,15.941) LCD2.27@77.459,14.901 ; LCD2.27@77.459,55.679 ccw(c76.419,54.639) 76.419,56.11 ccw(c76.419,57.581) LCD2.27@77.459,56.541 ; LCD2.27@77.459,97.319 ccw(c76.419,96.279) 76.419,97.75 ccw(c76.419,99.221) LCD2.27@77.459,98.181 ; LCD2.27@77.459,138.959 ccw(c76.419,137.919) 76.419,139.39 ccw(c76.419,140.861) LCD2.27@77.459,139.821 ; LCD1.27@83.97,13.861 cw(c83.97,12.389) 85.01,13.43 cw(c86.051,14.47) LCD1.27@84.579,14.47 ; LCD1.27@83.97,14.47 85.24,13.2 88.415,13.2 89.685,14.47 LCD2.27@91.59,14.47 ; LCD1.27@83.97,55.5 cw(c83.97,54.029) 85.01,55.07 cw(c86.051,56.11) LCD1.27@84.579,56.11 ; LCD1.27@83.97,56.11 85.24,54.84 88.415,54.84 89.685,56.11 LCD2.27@91.59,56.11 ; LCD1.27@83.97,97.14 cw(c83.97,95.669) 85.01,96.71 cw(c86.051,97.75) LCD1.27@84.579,97.75 ; LCD1.27@83.97,97.75 85.24,96.48 88.415,96.48 89.685,97.75 LCD2.27@91.59,97.75 ; LCD1.27@83.97,138.78 cw(c83.97,137.309) 85.01,138.35 cw(c86.051,139.39) LCD1.27@84.579,139.39 ; LCD1.27@83.97,139.39 85.24,138.12 88.415,138.12 89.685,139.39 LCD2.27@91.59,139.39 ; LCD2.27@91.159,14.039 ccw(c90.119,12.999) 90.119,14.47 ccw(c90.119,15.941) LCD2.27@91.159,14.901 ; LCD2.27@91.159,55.679 ccw(c90.119,54.639) 90.119,56.11 ccw(c90.119,57.581) LCD2.27@91.159,56.541 ; LCD2.27@91.159,97.319 ccw(c90.119,96.279) 90.119,97.75 ccw(c90.119,99.221) LCD2.27@91.159,98.181 ; LCD2.27@91.159,138.959 ccw(c90.119,137.919) 90.119,139.39 ccw(c90.119,140.861) LCD2.27@91.159,139.821 ; LCD1.27@97.67,13.861 cw(c97.67,12.389) 98.71,13.43 cw(c99.751,14.47) LCD1.27@98.279,14.47 ; LCD1.27@97.67,14.47 98.94,13.2 102.115,13.2 103.385,14.47 LCD2.27@105.29,14.47 ; LCD1.27@97.67,55.5 cw(c97.67,54.029) 98.71,55.07 cw(c99.751,56.11) LCD1.27@98.279,56.11 ; LCD1.27@97.67,56.11 98.94,54.84 102.115,54.84 103.385,56.11 LCD2.27@105.29,56.11 ; LCD1.27@97.67,97.14 cw(c97.67,95.669) 98.71,96.71 cw(c99.751,97.75) LCD1.27@98.279,97.75 ; LCD1.27@97.67,97.75 98.94,96.48 102.115,96.48 103.385,97.75 LCD2.27@105.29,97.75 ; LCD1.27@97.67,138.78 cw(c97.67,137.309) 98.71,138.35 cw(c99.751,139.39) LCD1.27@98.279,139.39 ; LCD1.27@97.67,139.39 98.94,138.12 102.115,138.12 103.385,139.39 LCD2.27@105.29,139.39 ; LCD2.27@104.859,14.039 ccw(c103.819,12.999) 103.819,14.47 ccw(c103.819,15.941) LCD2.27@104.859,14.901 ; LCD2.27@104.859,55.679 ccw(c103.819,54.639) 103.819,56.11 ccw(c103.819,57.581) LCD2.27@104.859,56.541 ; LCD2.27@104.859,97.319 ccw(c103.819,96.279) 103.819,97.75 ccw(c103.819,99.221) LCD2.27@104.859,98.181 ; LCD2.27@104.859,138.959 ccw(c103.819,137.919) 103.819,139.39 ccw(c103.819,140.861) LCD2.27@104.859,139.821 ; LCD1.27@111.37,13.861 cw(c111.37,12.389) 112.41,13.43 cw(c113.451,14.47) LCD1.27@111.979,14.47 ; LCD1.27@111.37,14.47 112.64,13.2 115.815,13.2 117.085,14.47 LCD2.27@118.99,14.47 ; LCD1.27@111.37,55.5 cw(c111.37,54.029) 112.41,55.07 cw(c113.451,56.11) LCD1.27@111.979,56.11 ; LCD1.27@111.37,56.11 112.64,54.84 115.815,54.84 117.085,56.11 LCD2.27@118.99,56.11 ; LCD1.27@111.37,97.14 cw(c111.37,95.669) 112.41,96.71 cw(c113.451,97.75) LCD1.27@111.979,97.75 ; LCD1.27@111.37,97.75 112.64,96.48 115.815,96.48 117.085,97.75 LCD2.27@118.99,97.75 ; LCD1.27@111.37,138.78 cw(c111.37,137.309) 112.41,138.35 cw(c113.451,139.39) LCD1.27@111.979,139.39 ; LCD1.27@111.37,139.39 112.64,138.12 115.815,138.12 117.085,139.39 LCD2.27@118.99,139.39 ; LCD2.27@118.559,14.039 ccw(c117.519,12.999) 117.519,14.47 ccw(c117.519,15.941) LCD2.27@118.559,14.901 ; LCD2.27@118.559,55.679 ccw(c117.519,54.639) 117.519,56.11 ccw(c117.519,57.581) LCD2.27@118.559,56.541 ; LCD2.27@118.559,97.319 ccw(c117.519,96.279) 117.519,97.75 ccw(c117.519,99.221) LCD2.27@118.559,98.181 ; LCD2.27@118.559,138.959 ccw(c117.519,137.919) 117.519,139.39 ccw(c117.519,140.861) LCD2.27@118.559,139.821 ; LCD1.27@125.07,13.861 cw(c125.07,12.389) 126.11,13.43 cw(c127.151,14.47) LCD1.27@125.679,14.47 ; LCD1.27@125.07,14.47 126.34,13.2 129.515,13.2 130.785,14.47 LCD2.27@132.69,14.47 ; LCD1.27@125.07,55.5 cw(c125.07,54.029) 126.11,55.07 cw(c127.151,56.11) LCD1.27@125.679,56.11 ; LCD1.27@125.07,56.11 126.34,54.84 129.515,54.84 130.785,56.11 LCD2.27@132.69,56.11 ; LCD1.27@125.07,97.14 cw(c125.07,95.669) 126.11,96.71 cw(c127.151,97.75) LCD1.27@125.679,97.75 ; LCD1.27@125.07,97.75 126.34,96.48 129.515,96.48 130.785,97.75 LCD2.27@132.69,97.75 ; LCD1.27@125.07,138.78 cw(c125.07,137.309) 126.11,138.35 cw(c127.151,139.39) LCD1.27@125.679,139.39 ; LCD1.27@125.07,139.39 126.34,138.12 129.515,138.12 130.785,139.39 LCD2.27@132.69,139.39 ; LCD2.27@132.259,14.039 ccw(c131.219,12.999) 131.219,14.47 ccw(c131.219,15.941) LCD2.27@132.259,14.901 ; LCD2.27@132.259,55.679 ccw(c131.219,54.639) 131.219,56.11 ccw(c131.219,57.581) LCD2.27@132.259,56.541 ; LCD2.27@132.259,97.319 ccw(c131.219,96.279) 131.219,97.75 ccw(c131.219,99.221) LCD2.27@132.259,98.181 ; LCD2.27@132.259,138.959 ccw(c131.219,137.919) 131.219,139.39 ccw(c131.219,140.861) LCD2.27@132.259,139.821